# Altium PCB MY_PCB.PcbDoc
Units mm, origin at the board's own origin, x right, y up, seen from the top; angles counter-clockwise.
Board outline 45.25 x 50.04 mm, 2 copper layers (Top Layer, Bottom Layer); 70 components, 116 nets, 318 pads, 38 vias.
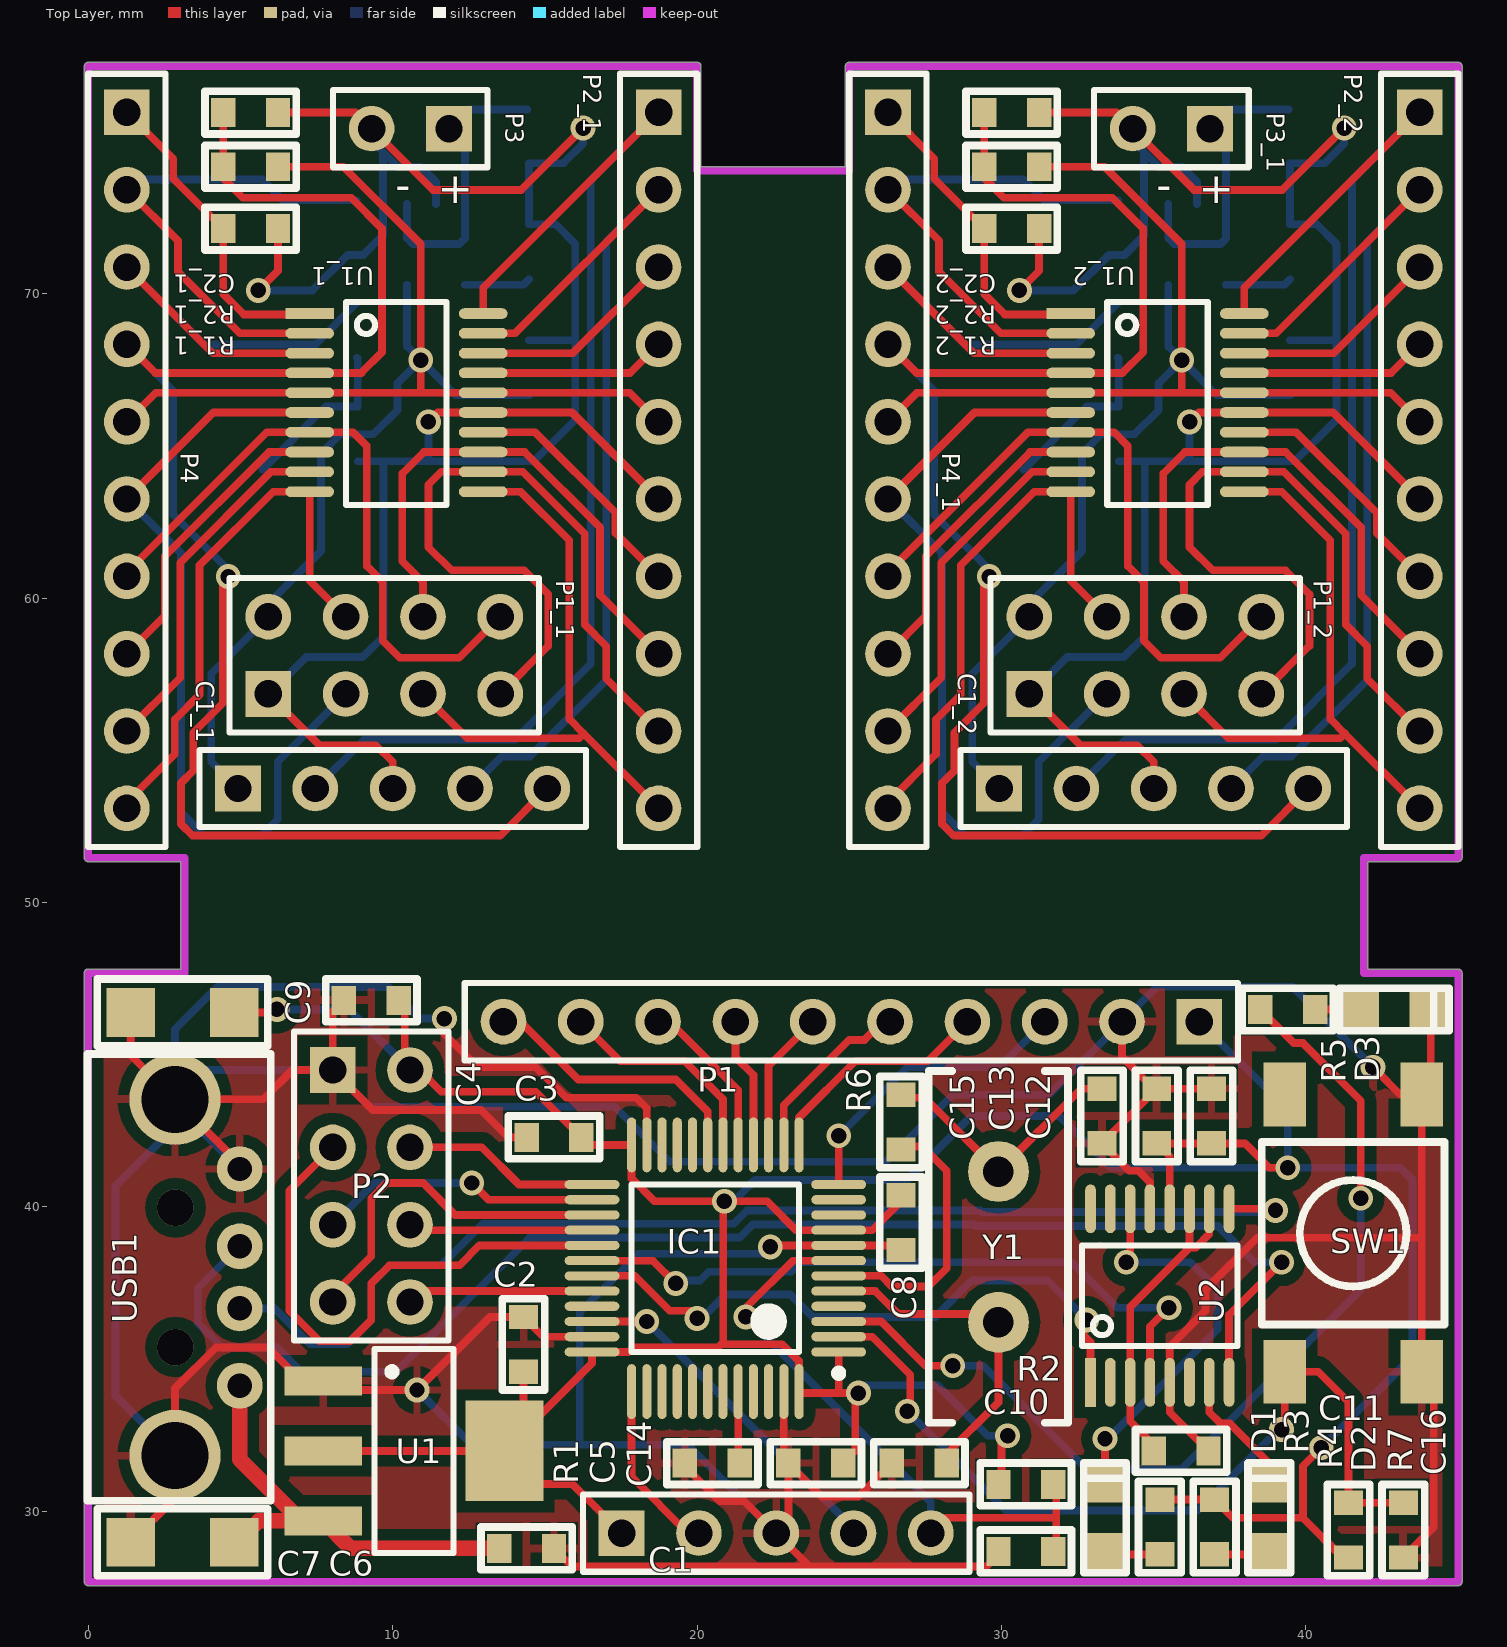
[diagram p0: Top Layer view]
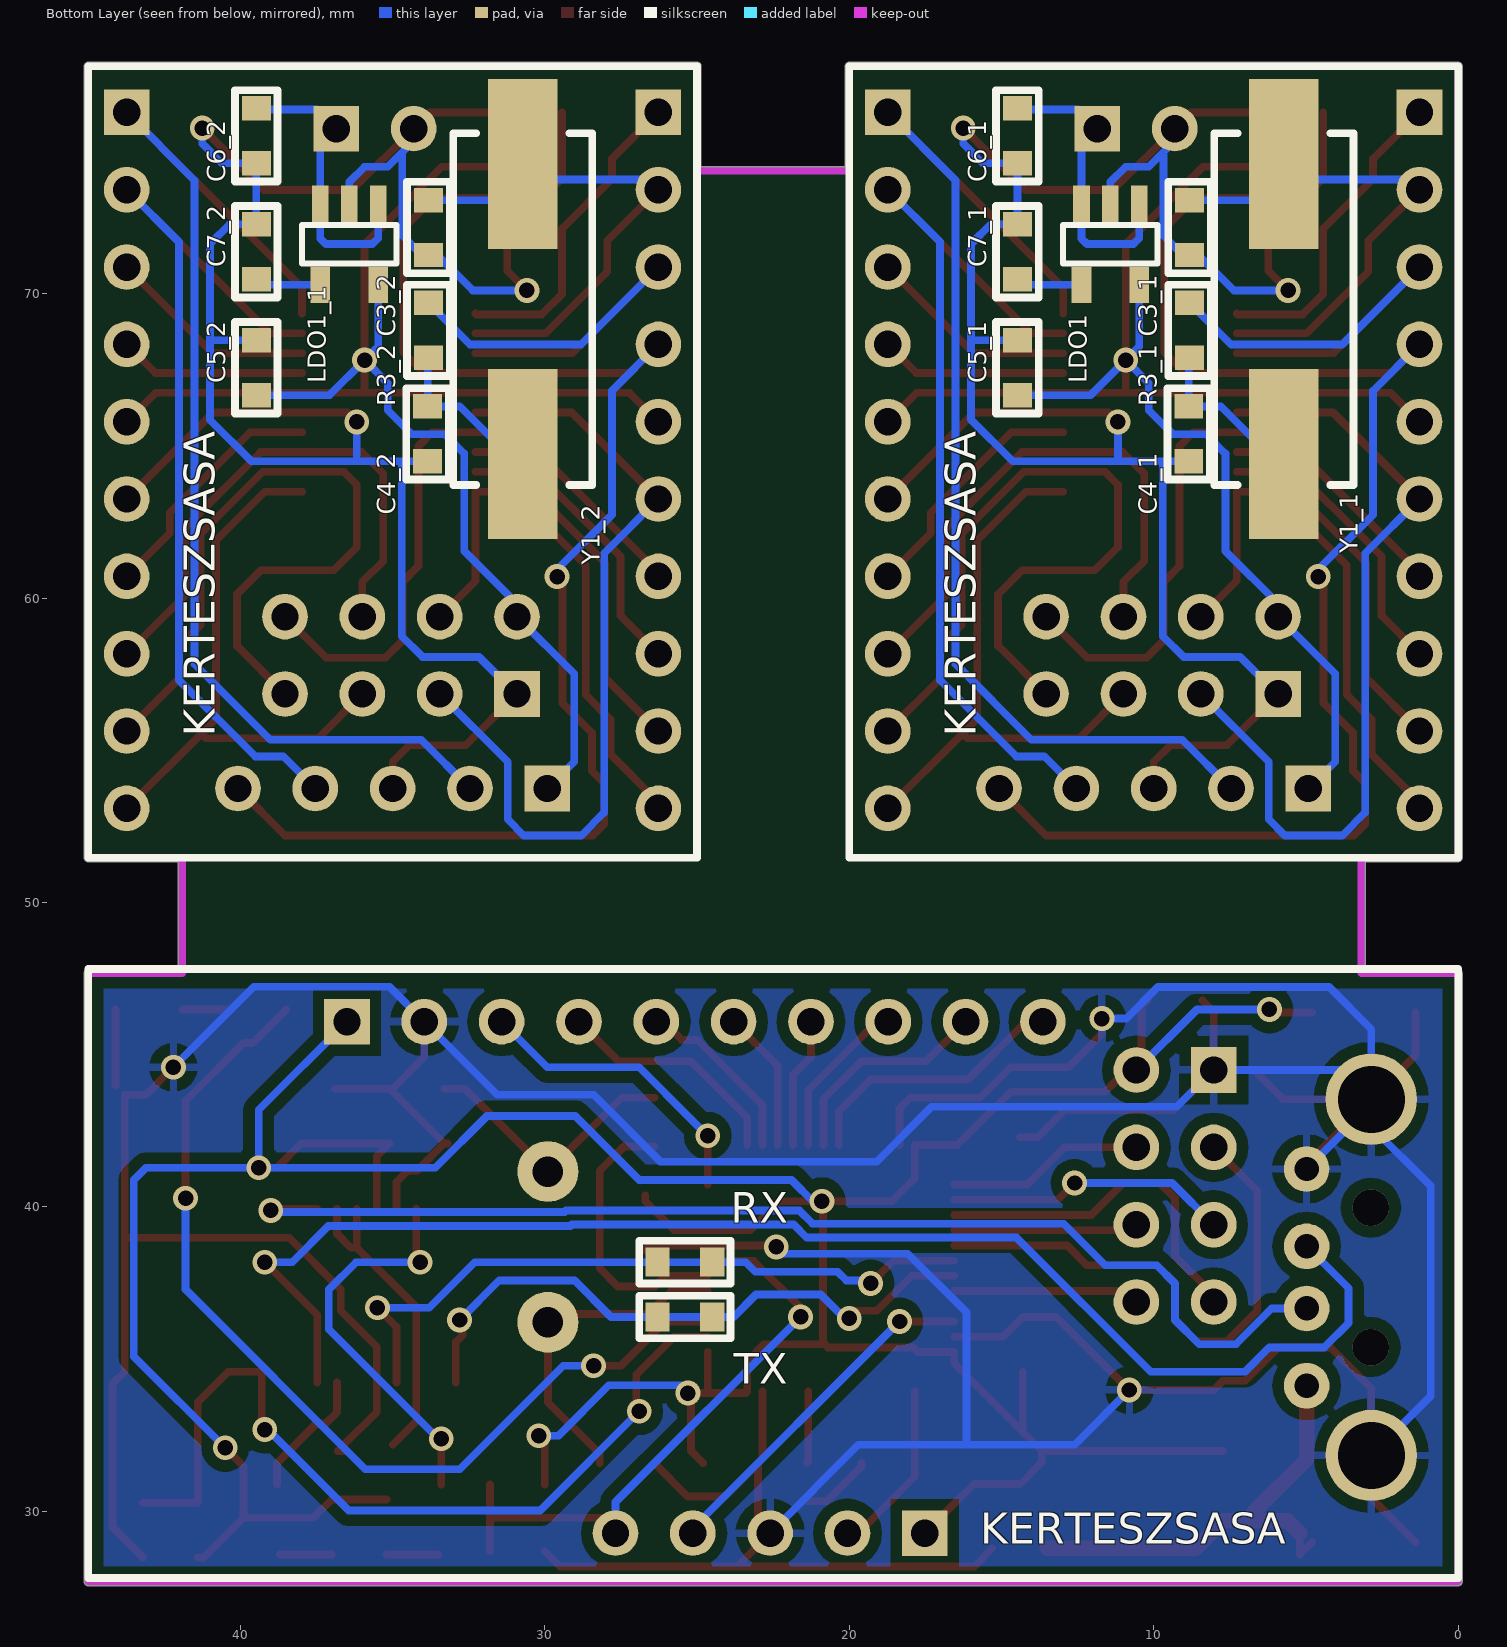
[diagram p1: Bottom Layer view, seen from below]

## Layer stack, top to bottom
Top Layer: signal copper 0.0356
Dielectric: dielectric 0.32, FR-4, Dk 4.8
Bottom Layer: signal copper 0.0356

## Board outline
-0.127,27.686 ccw(c0,27.686) 0,27.559 45,27.559 ccw(c45,27.686) 45.127,27.686 45.127,47.686 ccw(c45,47.686) 45,47.813 42.037,47.813 42.037,51.343 45,51.343 ccw(c45,51.47) 45.127,51.47 45.127,77.47 ccw(c45,77.47) 45,77.597 25,77.597 ccw(c25,77.47) 24.873,77.47 24.873,74.168 20.127,74.168 20.127,77.47 ccw(c20,77.47) 20,77.597 0,77.597 ccw(c0,77.47) -0.127,77.47 -0.127,51.47 ccw(c0,51.47) 0,51.343 3.048,51.343 3.048,47.813 0,47.813 ccw(c0,47.686) -0.127,47.686

## Design rules (kind name [scope] priority, off if disabled: settings)
Clearance [All] p1: gap=0.254
Height [All] p1: minheight=0 maxheight=50 prefheight=12.7
PolygonConnect [All] p1: connectstyle=Relief reliefconductorwidth=0.254 reliefentries=4 polygonreliefangle="90 Angle"
RoutingVias [All] p1: holewidth=0.711 width=1.27 viastyle="Through Hole" minholewidth=0.711 minwidth=1.27 maxholewidth=0.711 maxwidth=1.27
SilkscreenOverComponentPads [All] p1: minsilkscreentomaskgap=0.254
SolderMaskExpansion [All] p1: expansion=0.102
Width [All] p1: maxlimit=1.524 minlimit=0.254 preferedwidth=0.254
26 further rules are at their usual default settings.

## Classes and differential pairs
component class Servo_driver: C17 C19 C20 C21 C22 C23 C24 P5 R30 R31 R34 U3 Y2

## Components (designator, comment, footprint, x,y, rotation, side; value= is the part's Value field where it differs from the comment)
C1 "SWD" SWD 22.6,29.286 r90 top
C1_1 "SWD" SWD 10,53.745 r90 top (schematic designator C1)
C1_2 "SWD" SWD 35,53.745 r90 top (schematic designator C1)
C2 "100nF" FP_0603_CAP_080 14.3,35.486 r270 top
C2_1 "100nF" FP_0603_CAP_080 5.334,75.946 r0 top (schematic designator C2)
C2_2 "100nF" FP_0603_CAP_080 30.334,75.946 r0 top (schematic designator C2)
C3 "100nF" FP_0603_CAP_080 15.3,42.286 r0 top
C3_1 "22p" FP_0603_CAP_080 8.825,72.17 r90 bottom (schematic designator C3)
C3_2 "22p" FP_0603_CAP_080 33.825,72.17 r90 bottom (schematic designator C3)
C4 "100nF" FP_0603_CAP_080 9.3,46.786 r0 top
C4_1 "22p" FP_0603_CAP_080 8.85,65.395 r90 bottom (schematic designator C4)
C4_2 "22p" FP_0603_CAP_080 33.85,65.395 r90 bottom (schematic designator C4)
C5 "100nF" FP_0603_CAP_080 23.9,31.586 r0 top
C5_1 "10uF" FP_0603_CAP_080 14.478,67.564 r270 bottom (schematic designator C5)
C5_2 "10uF" FP_0603_CAP_080 39.478,67.564 r270 bottom (schematic designator C5)
C6 "100nF" FP_0603_CAP_080 14.4,28.786 r180 top
C6_1 "10uF" FP_0603_CAP_080 14.478,75.184 r90 bottom (schematic designator C6)
C6_2 "10uF" FP_0603_CAP_080 39.478,75.184 r90 bottom (schematic designator C6)
C7 "10uF" FP_1206_CAP_085 3.1,28.986 r180 top
C7_1 "10nF" FP_0603_CAP_080 14.478,71.374 r270 bottom (schematic designator C7)
C7_2 "10nF" FP_0603_CAP_080 39.478,71.374 r270 bottom (schematic designator C7)
C8 "100nF" FP_0603_CAP_080 26.7,39.486 r270 top
C9 "10uF" FP_1206_CAP_085 3.1,46.386 r0 top
C10 "100nF" FP_0603_CAP_080 30.8,28.686 r180 top
C11 "100nF" FP_0603_CAP_080 35.9,31.986 r0 top
C12 "1uF" FP_0603_CAP_080 36.9,42.986 r90 top
C13 "100nF" FP_0603_CAP_080 35.1,42.986 r90 top
C14 "22p" FP_0603_CAP_080 27.3,31.586 r0 top
C15 "22p" FP_0603_CAP_080 33.3,42.986 r90 top
C16 "100nF" FP_0603_CAP_080 43.2,29.386 r270 top
D1 "LED_RED" FP_0805_LED_RED 33.4,28.786 r90 top
D2 "LED_RED" FP_0805_LED_RED 38.8,28.786 r90 top
D3 "LED_RED" FP_0805_LED_RED 41.9,46.486 r0 top
IC1 "STM32F10x_TQFP48" LQFP48_N 20.6,37.986 r180 top
LDO1 "LP2985IM5-3.3" SUPPLY_SOT23-5 11.425,71.62 r270 bottom
LDO1_1 "LP2985IM5-3.3" SUPPLY_SOT23-5 36.425,71.62 r270 bottom (schematic designator LDO1)
P1 "Header 10" HDR1X10 36.5,46.086 r180 top
P1_1 "Header 4X2" FP_CONN8_SZK_ALLO 9.725,58.12 r0 top (schematic designator P1)
P1_2 "Header 4X2" FP_CONN8_SZK_ALLO 34.725,58.12 r0 top (schematic designator P1)
P2 "Header 4X2" FP_CONN8_SZK_ALLO 9.3,40.686 r270 top
P2_1 "Header 10" HDR1X10 18.736,75.952 r270 top (schematic designator P2)
P2_2 "Header 10" HDR1X10 43.736,75.952 r270 top (schematic designator P2)
P3 "Header 2" HDR1X2 11.85,75.42 r180 top
P3_1 "Header 2" HDR1X2 36.85,75.42 r180 top (schematic designator P3)
P4 "Header 10" HDR1X10 1.27,75.952 r270 top
P4_1 "Header 10" HDR1X10 26.27,75.952 r270 top (schematic designator P4)
R1 "10k" FP_0603_RES 20.5,31.586 r0 top
R1_1 "10k" FP_0603_RES 5.334,72.136 r180 top (schematic designator R1)
R1_2 "10k" FP_0603_RES 30.334,72.136 r180 top (schematic designator R1)
R2 "10k" FP_0603_RES 30.8,30.886 r0 top
R2_1 "10k" FP_0603_RES 5.334,74.168 r180 top (schematic designator R2)
R2_2 "10k" FP_0603_RES 30.334,74.168 r180 top (schematic designator R2)
R3 "330R" FP_0603_RES 35.2,29.486 r270 top
R3_1 "390R" FP_0603_RES 8.825,68.795 r270 bottom (schematic designator R3)
R3_2 "390R" FP_0603_RES 33.825,68.795 r270 bottom (schematic designator R3)
R4 "330R" FP_0603_RES 37,29.486 r270 top
R5 "330R" FP_0603_RES 39.4,46.486 r0 top
R6 "390R" FP_0603_RES 26.7,42.786 r90 top
R7 "10k" FP_0603_RES 41.4,29.386 r90 top
RX "0R" FP_0603_RES 25.4,38.186 r180 bottom
SW1 "SW1" FP_TACTBTN 43.8,43.686 r0 top
TX "0R" FP_0603_RES 25.4,36.386 r180 bottom
U1 "LD1117xx" SUPPLY_SOT223 10.7,31.986 r0 top
U1_1 "STM32F030F4P6" uC_TSSOP20 10.125,65.77 r0 top (schematic designator U1)
U1_2 "STM32F030F4P6" uC_TSSOP20 35.125,65.77 r0 top (schematic designator U1)
U2 "FT230XS" Digital_TSSOP16 35.2,37.086 r90 top
USB1 "USB connector" USB_A_th 5.08,37.686 r0 top
Y1 "8MHz Quartz HC49" FP_CRYSTAL_HC49_TH 29.9,38.686 r270 top
Y1_1 "8MHz Quartz HC49" FP_CRYSTAL_HC49_SMD 5.725,64.728 r90 bottom (schematic designator Y1)
Y1_2 "8MHz Quartz HC49" FP_CRYSTAL_HC49_SMD 30.725,64.728 r90 bottom (schematic designator Y1)

## Footprints (in the part's own frame and the unit in brackets; to place one, negate y for a bottom-side part, rotate by r counter-clockwise, add the part's x,y. Pads: shape width x height; smd on the part's side, far side on the other; paste and mask are expansions set on the pad)
Digital_TSSOP16 [mm] "TSSOP 16 l"
  rect 1.6x0.35 smd: 1(-2.85,2.275)
  oval 1.6x0.35 smd: 2(-2.85,1.625) 3(-2.85,0.975) 4(-2.85,0.325) 5(-2.85,-0.325) 6(-2.85,-0.975) 7(-2.85,-1.625) 8(-2.85,-2.275) 9(2.85,-2.275) 10(2.85,-1.625) 11(2.85,-0.975) 12(2.85,-0.325) 13(2.85,0.325) 14(2.85,0.975) 15(2.85,1.625) 16(2.85,2.275)
  silkscreen extent -1.65,-2.55 1.65,2.55, body extent -3.23,-2.56 3.23,2.54, height 1.35
FP_0603_CAP_080 [mm] "0.8mm magas 0603 kapacitás"
  rect 0.8x0.95 smd: 1(-0.9,0) 2(0.9,0)
  silkscreen extent -1.5,-0.7 1.5,0.7, body extent -0.8,-0.4 0.76,0.4, height 0.8
FP_0603_RES [mm] "0603 ellenállás"
  rect 0.8x0.95 smd: 1(-0.9,0) 2(0.9,0)
  silkscreen extent -1.5,-0.7 1.5,0.7, body extent -0.8,-0.4 0.8,0.4, height 0.44
FP_0805_LED_RED [mm] "0805 méretû piros LED"
  rect 1.2x1.3 smd: A(-0.1,0) K(2.1,0)
  silkscreen extent -0.8,-0.7 2.8,0.7, body extent 0.01,-0.63 2.03,0.62, height 1.1
FP_1206_CAP_085 [mm] "1206 kapacitás 0.85 mm"
  rect 1.6x1.6 smd: 1(-1.7,0) 2(1.7,0)
  silkscreen extent -2.8,-1.1 2.8,1.1, body extent -1.52,-0.79 1.58,0.79, height 0.85
FP_CONN8_SZK_ALLO [mm] "Connector; Header; 4x2 Position"
  rect 1.5x1.5 hole 0.9: 1(-3.81,-1.27)
  round 1.5 hole 0.9: 2(-3.81,1.27) 3(-1.27,-1.27) 4(-1.27,1.27) 5(1.27,-1.27) 6(1.27,1.27) 7(3.81,-1.27) 8(3.81,1.27)
  silkscreen extent -5.08,-2.54 5.08,2.54
FP_CRYSTAL_HC49_SMD [mil] "HC49/SMD"
  rect 220x90 smd: 1(0,0) 2(375,0)
  silkscreen extent -40,-90 415,90, body extent -57,-90 432,90, height 130
FP_CRYSTAL_HC49_TH [mm] "HC49/SMD"
  round 2 hole 1: 1(-2.476,0) 2(2.477,0)
  silkscreen extent -5.78,-2.29 5.78,2.29, body extent -5.49,-2.29 5.49,2.21, height 3.6
FP_TACTBTN [mm] "TE CONNECTIVITY / ALCOSWITCH - FSM2JSMA"
  rect 1.4x2.1 smd: 1(0,0) 2(0,-9.1) 3(-4.5,0) 4(-4.5,-9.1)
  silkscreen extent -5.25,-7.55 0.75,-1.55, body extent -5.23,-8.57 0.77,-0.42, height 5
HDR1X2 [mm] "Connector; Header; 2 Position"
  rect 1.5x1.5 hole 0.9: 1(0,0)
  round 1.5 hole 0.9: 2(2.54,0)
  silkscreen extent -1.27,-1.27 3.81,1.27
HDR1X10 [mm] "Connector; Header; 10 Position"
  rect 1.5x1.5 hole 0.9: 1(0,0)
  round 1.5 hole 0.9: 2(2.54,0) 3(5.08,0) 4(7.62,0) 5(10.16,0) 6(12.7,0) 7(15.24,0) 8(17.78,0) 9(20.32,0) 10(22.86,0)
  silkscreen extent -1.27,-1.27 24.13,1.27
LQFP48_N [mm] "Thin QFP, 48-Leads, Body 7x7mm, Pitch 0.5mm, IPC Medium Density"
  oval 1.8x0.3 smd: 1(-4.05,2.75) 2(-4.05,2.25) 3(-4.05,1.75) 4(-4.05,1.25) 5(-4.05,0.75) 6(-4.05,0.25) 7(-4.05,-0.25) 8(-4.05,-0.75) 9(-4.05,-1.25) 10(-4.05,-1.75) 11(-4.05,-2.25) 12(-4.05,-2.75) 25(4.05,-2.75) 26(4.05,-2.25) 27(4.05,-1.75) 28(4.05,-1.25) 29(4.05,-0.75) 30(4.05,-0.25) 31(4.05,0.25) 32(4.05,0.75) 33(4.05,1.25) 34(4.05,1.75) 35(4.05,2.25) 36(4.05,2.75)
  oval 0.3x1.8 smd: 13(-2.75,-4.05) 14(-2.25,-4.05) 15(-1.75,-4.05) 16(-1.25,-4.05) 17(-0.75,-4.05) 18(-0.25,-4.05) 19(0.25,-4.05) 20(0.75,-4.05) 21(1.25,-4.05) 22(1.75,-4.05) 23(2.25,-4.05) 24(2.75,-4.05) 37(2.75,4.05) 38(2.25,4.05) 39(1.75,4.05) 40(1.25,4.05) 41(0.75,4.05) 42(0.25,4.05) 43(-0.25,4.05) 44(-0.75,4.05) 45(-1.25,4.05) 46(-1.75,4.05) 47(-2.25,4.05) 48(-2.75,4.05)
  silkscreen extent -4.18,-2.75 2.75,3.57, body extent -3.5,-3.5 3.5,3.5, height 1.6
SUPPLY_SOT23-5 [mm] "SOT23, 5-Leads, Body 2.9x1.6mm, Pitch 0.95mm, Lead Span 2.8mm, IPC Medium Density"
  rect 1.2x0.55 smd mask+0.05: 1(-1.327,0.95) 2(-1.327,0) 3(-1.327,-0.95)
  rect 1.2x0.65 smd: 4(1.327,-0.95) 5(1.327,0.95)
  silkscreen extent -0.64,-1.55 0.64,1.55, body extent -1.17,-1.46 1.17,1.46, height 1
SUPPLY_SOT223 [mm] "SOT223 package, 3 leads"
  rect 2.55x0.95 smd: 1(-2.975,2.3) 2(-2.975,0) 3(-2.975,-2.3)
  rect 2.55x3.3 smd: 2(2.975,0)
  silkscreen extent -1.3,-3.35 1.3,3.35, body extent -3.5,-3.25 3.5,3.25, height 1.65
SWD [mm]
  rect 1.5x1.5 hole 0.9: 1(0,5.08)
  round 1.5 hole 0.9: 2(0,2.54) 3(0,0) 4(0,-2.54) 5(0,-5.08)
  silkscreen extent -1.27,-6.35 1.27,6.35
uC_TSSOP20 [mm]
  rect 1.6x0.35 smd: 1(-2.85,3.575)
  oval 1.6x0.35 smd: 2(-2.85,2.925) 3(-2.85,2.275) 4(-2.85,1.625) 5(-2.85,0.975) 6(-2.85,0.325) 7(-2.85,-0.325) 8(-2.85,-0.975) 9(-2.85,-1.625) 10(-2.85,-2.275) 11(2.85,-2.275) 12(2.85,-1.625) 13(2.85,-0.975) 14(2.85,-0.325) 15(2.85,0.325) 16(2.85,0.975) 17(2.85,1.625) 18(2.85,2.275) 19(2.85,2.925) 20(2.85,3.575)
  silkscreen extent -1.65,-2.72 1.65,3.95, body extent -3.1,-2.72 3.18,3.78, height 1.09
USB_A_th [mm]
  round 1.5 hole 0.8: 1(-0.102,-3.56) 2(-0.102,-1.02) 3(-0.102,1.02) 4(-0.102,3.56)
  round 3 hole 2.2: 5(-2.228,5.85) 6(-2.228,-5.85)
  round 0.1 on Top Overlay: 7(0,0.002)
  silkscreen extent -5.11,-7.34 0.91,7.34, body extent -19.92,-6.3 0,6.31, height 3.2

## Part data
C1 C1_1 C1_2: "ARM SWD connector"
C2 C2_1 C2_2 C3 C3_1 C3_2 C4 C4_1 C4_2 C5 C5_1 C5_2 C6 C6_1 C6_2 C7 C7_1 C7_2 C8 C9 C10 C11 C12 C13 C14 C15 C16: library part Cap, "Capacitor"
D1 D2 D3: library part LED_R, "Typical LED"
LDO1 LDO1_1: library part LP2985, "Micropower 150 mA Ultra Low-Dropout Regulator In SOT-23/6 and micro SMD Packages"
P1 P2_1 P2_2 P4 P4_1: "Header, 10-Pin"
P1_1 P1_2 P2: "Header, 4-Pin, Dual row"
P3 P3_1: "Header, 2-Pin"
R1 R1_1 R1_2 R2 R2_1 R2_2 R3 R3_1 R3_2 R4 R5 R6 R7 RX TX: library part Res3, "Resistor"
U1: "LD1117xx 3,3V lin reg"
U1_1 U1_2: "MCU 32-bit STM32F ARM Cortex M0 RISC 16KB Flash 2.5V/3.3V 20-Pin TSSOP"
U2: "USB-SERIAL"
USB1: library part USB_B_TH, "USB B conn TH"
Y1 Y1_1 Y1_2: library part "XTAL HC49", "Standard HC49 quartz"

## Via types
v1: diameter 0.813, hole 0.508, Top Layer to Bottom Layer, 36 vias
v2: diameter 1.2, hole 1.2, Top Layer to Bottom Layer, 2 vias

## Nets (pads, with @x,y where several pads share a name; then routed paths per layer and width w, separated by ;. In a path a pad name is that pad's centre, name@x,y a point inside that pad or via, vN(x,y) a via of type N, cw(c..) or ccw(c..) an arc to the next point about the centre after c; other vN are vias at no path point)
3V3: 
5V: 
A/D1: 
A/D2: 
A/D3: 
A/D4: 
AGND: 
BOOT0: 
DIGITAL_OUT_1: 
DIGITAL_OUT_2: 
DIGITAL_OUT_3: 
DIGITAL_OUT_4: 
DIGITAL_OUT_5: 
DIGITAL_OUT_6: 
GND: 
MISO: 
MOSI: 
NetC7_1: 
NetC7_2: 
NetC8_1: 
NetC15_2: 
NetC17_2: 
NetD1_A: 
NetD2_A: 
NetD3_K: 
NetD4_A: 
NetP1_1: 
NetP1_2: 
NetP1_3: 
NetP1_4: 
NetP1_5: 
NetP1_6: 
NetP1_7: 
NetP1_8: 
NetP1_9: 
NetP1_10: 
NetP1_11: 
NetP1_12: 
NetP1_13: 
NetP1_14: 
NetP1_15: 
NetP1_16: 
NetP1_17: 
NetP1_18: 
NetP3_1: 
NetP3_2: 
NetP3_3: 
NetP3_4: 
NetP3_5: 
NetP3_6: 
NetR2_1: 
NetR4_1: 
NetR5_1: 
NetR6_1: 
NetR7_1: 
NetR8_1: 
NetR9_1: 
NetR10_1: 
NetR12_1: 
NetR15_1: 
NetR16_1: 
NetR17_1: 
NetR18_1: 
NetR19_1: 
NetR20_1: 
NetR21_1: 
NetR22_1: 
NetR23_1: 
NetR24_1: 
NetR25_1: 
NetR26_1: 
NetR27_1: 
NetR28_1: 
NetR29_1: 
NetR30_1: 
NRST: 
NSS: 
NTRST: 
OSC32_IN: 
OSC32_OUT: 
OSC_IN: 
OSC_OUT: 
PROG_RX: 
PROG_TX: 
RX: 
SCK: 
SCL: 
SDA: 
SERVO_PWM1: 
SERVO_PWM2: 
SERVO_PWM3: 
SERVO_PWM4: 
SERVO_PWM5: 
SERVO_PWM6: 
SERVO_PWM7: 
SERVO_PWM8: 
SERVO_PWM9: 
SERVO_PWM10: 
SERVO_PWM11: 
SERVO_PWM12: 
SERVO_PWM13: 
SERVO_PWM14: 
SERVO_PWM15: 
SERVO_PWM16: 
SERVO_PWM17: 
SERVO_PWM18: 
TCK: 
TDI: 
TDO: 
TMS: 
TX: 
VCC: 
VDA: 
VDU_BAT: 
VIN: 
VREFH: 
pads on no net: C1.1 C1.2 C1.3 C1.4 C1.5 C1_1.1 C1_1.2 C1_1.3 C1_1.4 C1_1.5 C1_2.1 C1_2.2 C1_2.3 C1_2.4 C1_2.5 C2.1 C2.2 C2_1.1 C2_1.2 C2_2.1 C2_2.2 C3.1 C3.2 C3_1.1 C3_1.2 C3_2.1 C3_2.2 C4.1 C4.2 C4_1.1 C4_1.2 C4_2.1 C4_2.2 C5.1 C5.2 C5_1.1 C5_1.2 C5_2.1 C5_2.2 C6.1 C6.2 C6_1.1 C6_1.2 C6_2.1 C6_2.2 C7.1 C7.2 C7_1.1 C7_1.2 C7_2.1 C7_2.2 C8.1 C8.2 C9.1 C9.2 C10.1 C10.2 C11.1 C11.2 C12.1 C12.2 C13.1 C13.2 C14.1 C14.2 C15.1 C15.2 C16.1 C16.2 D1.A D1.K D2.A D2.K D3.A D3.K IC1.1 IC1.2 IC1.3 IC1.4 IC1.5 IC1.6 IC1.7 IC1.8 IC1.9 IC1.10 IC1.11 IC1.12 IC1.13 IC1.14 IC1.15 IC1.16 IC1.17 IC1.18 IC1.19 IC1.20 IC1.21 IC1.22 IC1.23 IC1.24 IC1.25 IC1.26 IC1.27 IC1.28 IC1.29 IC1.30 IC1.31 IC1.32 IC1.33 IC1.34 IC1.35 IC1.36 IC1.37 IC1.38 IC1.39 IC1.40 IC1.41 IC1.42 IC1.43 IC1.44 IC1.45 IC1.46 IC1.47 IC1.48 LDO1.1 LDO1.2 LDO1.3 LDO1.4 LDO1.5 LDO1_1.1 LDO1_1.2 LDO1_1.3 LDO1_1.4 LDO1_1.5 P1.1 P1.2 P1.3 P1.4 P1.5 P1.6 P1.7 P1.8 P1.9 P1.10 P1_1.1 P1_1.2 P1_1.3 P1_1.4 P1_1.5 P1_1.6 P1_1.7 P1_1.8 P1_2.1 P1_2.2 P1_2.3 P1_2.4 P1_2.5 P1_2.6 P1_2.7 P1_2.8 P2.1 P2.2 P2.3 P2.4 P2.5 P2.6 P2.7 P2.8 P2_1.1 P2_1.2 P2_1.3 P2_1.4 P2_1.5 P2_1.6 P2_1.7 P2_1.8 P2_1.9 P2_1.10 P2_2.1 P2_2.2 P2_2.3 P2_2.4 P2_2.5 P2_2.6 P2_2.7 P2_2.8 P2_2.9 P2_2.10 P3.1 P3.2 P3_1.1 P3_1.2 P4.1 P4.2 P4.3 P4.4 P4.5 P4.6 P4.7 P4.8 P4.9 P4.10 P4_1.1 P4_1.2 P4_1.3 P4_1.4 P4_1.5 P4_1.6 P4_1.7 P4_1.8 P4_1.9 P4_1.10 R1.1 R1.2 R1_1.1 R1_1.2 R1_2.1 R1_2.2 R2.1 R2.2 R2_1.1 R2_1.2 R2_2.1 R2_2.2 R3.1 R3.2 R3_1.1 R3_1.2 R3_2.1 R3_2.2 R4.1 R4.2 R5.1 R5.2 R6.1 R6.2 R7.1 R7.2 RX.1 RX.2 SW1.1 SW1.2 SW1.3 SW1.4 TX.1 TX.2 U1.1 U1.2 U1.3 U1_1.1 U1_1.2 U1_1.3 U1_1.4 U1_1.5 U1_1.6 U1_1.7 U1_1.8 U1_1.9 U1_1.10 U1_1.11 U1_1.12 U1_1.13 U1_1.14 U1_1.15 U1_1.16 U1_1.17 U1_1.18 U1_1.19 U1_1.20 U1_2.1 U1_2.2 U1_2.3 U1_2.4 U1_2.5 U1_2.6 U1_2.7 U1_2.8 U1_2.9 U1_2.10 U1_2.11 U1_2.12 U1_2.13 U1_2.14 U1_2.15 U1_2.16 U1_2.17 U1_2.18 U1_2.19 U1_2.20 U2.1 U2.2 U2.3 U2.4 U2.5 U2.6 U2.7 U2.8 U2.9 U2.10 U2.11 U2.12 U2.13 U2.14 U2.15 U2.16 USB1.1 USB1.2 USB1.3 USB1.4 USB1.5 USB1.6 USB1.7 Y1.1 Y1.2 Y1_1.1 Y1_1.2 Y1_2.1 Y1_2.2
copper on no net: | length 1740.4
  Top Layer w0.254: 1.27,53.092 1.27,53.298 2.845,54.873 2.845,56.007 3.658,56.82 3.658,61.078 6.075,63.495 7.275,63.495 7.275,60.57 8.455,59.39 ; 1.27,55.632 3.023,57.385 3.023,61.161 6.007,64.145 7.275,64.145 ; 1.27,58.172 2.515,59.417 2.515,61.371 5.938,64.795 7.275,64.795 ; 1.27,60.712 1.27,60.845 5.87,65.445 7.275,65.445 8.7,65.445 9.15,64.995 9.15,61.056 9.677,60.528 9.677,58.598 10.236,58.039 12.184,58.039 13.535,59.39 ; 1.27,63.252 4.113,66.095 7.275,66.095 ; 1.27,65.792 2.223,66.745 7.275,66.745 10.922,66.745 ; 1.27,68.332 2.207,67.395 7.275,67.395 8.975,67.395 9.652,68.072 9.652,72.136 8.636,73.152 5.08,73.152 4.434,73.798 4.434,75.946 ; 1.27,70.872 4.097,68.045 7.275,68.045 ; 1.27,73.412 2.95,71.732 2.95,70.72 4.975,68.695 7.275,68.695 ; 1.27,75.35 1.27,75.952 2.794,74.428 2.794,73.776 4.434,72.136 4.434,69.988 5.106,69.316 7.246,69.316 7.275,69.345 ; 1.4,28.986 2.852,30.438 2.852,31.836 2.852,34.038 4.2,35.386 5.9,35.386 7,34.286 7.725,34.286 8.025,33.986 v1(10.8,33.986) 13.2,36.386 14.3,36.386 14.95,35.736 16.55,35.736 ; 1.4,46.386 1.4,44.988 2.852,43.536 ; v1(4.597,60.706) 4.42,60.528 4.42,56.54 3.454,55.575 3.454,54.331 3.048,53.924 3.048,52.578 3.429,52.197 13.532,52.197 15.08,53.745 ; 4.8,28.986 5.2,28.586 5.2,29.286 ; 4.8,46.386 6.1,46.386 v1(6.2,46.486) ; 4.978,41.246 4.978,41.41 2.852,43.536 ; v1@5.841,70.103 5.841,70.357 6.234,70.75 6.234,72.136 ; 6.234,74.168 8.382,74.168 10.922,71.628 v1(10.922,67.818) 10.922,66.745 ; 6.234,75.946 8.784,75.946 9.31,75.42 11.324,73.406 14.224,73.406 v1(16.256,75.438) ; 6.294,56.85 5.915,56.85 7.596,55.169 9.449,55.169 10,54.618 10,53.745 9.399,53.745 ; 6.7,29.986 6.4,29.686 7.725,29.686 ; 7.725,31.986 13.675,31.986 ; 8.03,36.876 8.03,37.116 9.3,38.386 9.3,40.286 9.8,40.786 11,40.786 12.05,39.736 16.55,39.736 ; 8.03,41.956 6.6,40.526 6.6,36.586 7.6,35.586 8.6,35.586 9.3,36.286 9.3,37.486 9.9,38.086 12.2,38.086 12.85,38.736 16.55,38.736 ; 8.4,46.786 8.03,46.416 8.03,44.496 ; 10.2,46.786 10.4,46.586 10.4,44.666 10.57,44.496 10.89,44.496 11.6,43.786 14.7,43.786 16.2,42.286 16.45,42.036 17.85,42.036 17.85,40.936 18.6,40.186 v1@21.1,40.186 ; 10.57,36.876 10.79,36.876 11.15,37.236 16.55,37.236 ; 10.57,39.416 10.75,39.236 16.55,39.236 ; 10.57,41.956 12.93,41.956 14.15,40.736 16.55,40.736 ; 10.995,56.85 12.448,55.397 16.129,55.397 16.28,55.548 ; 10.995,59.39 10.995,60.531 10.312,61.214 10.312,64.089 11.018,64.795 12.975,64.795 14.337,64.795 16.815,62.317 16.815,60.093 18.736,58.172 ; v1(11.176,65.786) 11.485,66.095 12.975,66.095 15.893,66.095 18.736,63.252 ; v1(11.7,46.186) 11.7,45.686 12.8,44.586 14.7,44.586 15.7,43.586 18,43.586 18.35,43.236 18.35,42.036 ; v1(12.6,40.786) 13.15,40.236 16.55,40.236 ; 12.975,63.495 14.2,63.495 15.799,61.896 15.799,56.029 16.28,55.548 ; 12.975,65.445 14.675,65.445 17.323,62.797 17.323,62.125 18.736,60.712 ; 12.975,67.395 17.799,67.395 18.736,68.332 ; 12.975,68.045 15.909,68.045 18.736,70.872 ; 12.975,68.695 14.019,68.695 18.736,73.412 ; 12.975,69.345 12.975,70.191 18.736,75.952 ; 13.535,56.85 15.113,58.428 15.113,60.122 14.326,60.909 11.938,60.909 11.176,61.671 11.176,63.721 11.6,64.145 12.975,64.145 14.268,64.145 16.307,62.107 16.307,59.131 17.018,58.42 17.018,57.35 18.736,55.632 ; 13.64,46.086 14.2,46.086 16.1,44.186 19.3,44.186 20.35,43.136 20.35,42.036 ; 14.3,34.586 14.3,32.611 ; 14.4,42.286 13.8,42.286 12.9,43.186 9.34,43.186 8.03,44.496 ; 15.3,28.786 15.9,28.186 23.7,28.186 ; 16.18,46.086 17.48,44.786 19.6,44.786 20.85,43.536 20.85,42.036 ; 16.55,36.236 v1(18.35,36.236) ; 16.55,37.736 17.95,37.736 19.1,36.586 20,36.586 v1@20,36.436 ; 16.55,38.236 18.55,38.236 v1(19.3,37.486) ; 17.52,29.286 16.66,30.146 15.91,30.896 14.39,30.896 13.675,31.611 13.675,31.986 ; 17.85,33.936 17.85,31.136 19.7,29.286 20.06,29.286 ; 18.72,46.086 19.1,46.086 21.35,43.836 21.35,42.036 ; 18.736,53.092 16.28,55.548 ; 18.736,65.792 17.783,66.745 12.975,66.745 10.922,66.745 ; 19.6,31.586 19.6,31.486 20.75,30.336 21.55,30.336 22.6,29.286 ; 20.8,35.486 22.8,35.486 23.35,34.936 23.35,33.936 ; 21.26,46.086 21.26,44.926 21.85,44.336 21.85,42.036 ; 21.35,33.936 21.35,31.636 21.4,31.586 ; v1(21.6,36.386) 21.6,36.686 23.15,38.236 24.65,38.236 ; 22.35,42.036 22.35,44.636 23.8,46.086 ; v1(22.4,38.686) 22.45,38.736 24.65,38.736 26.55,38.736 26.7,38.586 ; 22.85,31.736 22.85,33.936 ; 22.85,42.036 22.85,43.336 25,45.486 25.5,45.486 26.1,46.086 26.34,46.086 ; 23.35,42.036 23.35,42.936 25.2,44.786 27.58,44.786 28.88,46.086 ; 23.4,33.886 v1(25.3,33.886) 25.2,33.786 25.2,31.986 24.8,31.586 ; 24.65,33.936 24.65,35.236 ; 24.65,35.736 25.75,35.736 27,34.486 27,33.386 v1(26.9,33.286) ; 24.65,36.236 26.05,36.236 27.5,34.786 v1(28.4,34.786) ; 24.65,37.236 25.85,37.236 26.6,36.486 29.623,36.486 29.9,36.209 29.9,33.586 28.2,31.886 28.2,31.586 ; 24.65,37.736 26.05,37.736 26.4,37.386 27.6,37.386 28.2,37.986 28.2,41.186 27.4,41.986 26.4,41.986 ; 24.65,40.736 v1(24.65,42.336) ; 26.27,53.092 26.27,53.298 27.845,54.873 27.845,56.007 28.658,56.82 28.658,61.078 31.075,63.495 32.275,63.495 32.275,60.57 33.455,59.39 ; 26.27,55.632 28.023,57.385 28.023,61.161 31.007,64.145 32.275,64.145 ; 26.27,58.172 27.515,59.417 27.515,61.371 30.938,64.795 32.275,64.795 ; 26.27,60.712 26.27,60.845 30.87,65.445 32.275,65.445 33.7,65.445 34.15,64.995 34.15,61.056 34.677,60.528 34.677,58.598 35.236,58.039 37.184,58.039 38.535,59.39 ; 26.27,63.252 29.113,66.095 32.275,66.095 ; 26.27,65.792 27.223,66.745 32.275,66.745 35.922,66.745 ; 26.27,68.332 27.207,67.395 32.275,67.395 33.975,67.395 34.652,68.072 34.652,72.136 33.636,73.152 30.08,73.152 29.434,73.798 29.434,75.946 ; 26.27,70.872 29.097,68.045 32.275,68.045 ; 26.27,73.412 27.95,71.732 27.95,70.72 29.975,68.695 32.275,68.695 ; 26.27,75.35 26.27,75.952 27.794,74.428 27.794,73.776 29.434,72.136 29.434,69.988 30.106,69.316 32.246,69.316 32.275,69.345 ; 26.4,31.586 25.3,30.486 24.1,30.486 23,31.586 23,29.686 22.6,29.286 ; 26.4,43.586 27.476,43.586 29.9,41.163 32.624,43.886 33.3,43.886 ; 26.7,40.386 26.7,40.186 25.75,39.236 24.65,39.236 23.25,39.236 22.3,40.186 v1@21.1,40.186 ; 27.68,29.286 28.18,29.786 31.8,29.786 ; v1(29.597,60.706) 29.42,60.528 29.42,56.54 28.454,55.575 28.454,54.331 28.048,53.924 28.048,52.578 28.429,52.197 38.532,52.197 40.08,53.745 ; 30,28.686 29.5,28.186 23.7,28.186 ; 30,30.886 30,32.286 v1(30.2,32.486) ; v1@30.841,70.103 30.841,70.357 31.234,70.75 31.234,72.136 ; 31.234,74.168 33.382,74.168 35.922,71.628 v1(35.922,67.818) 35.922,66.745 ; 31.234,75.946 33.784,75.946 34.31,75.42 36.324,73.406 39.224,73.406 v1(41.256,75.438) ; 31.294,56.85 30.915,56.85 32.596,55.169 34.449,55.169 35,54.618 35,53.745 34.399,53.745 ; 31.8,28.686 31.8,29.786 ; 31.8,30.886 31.8,29.786 ; v1(32.8,36.286) 32.7,36.186 32.7,35.786 32.925,35.561 32.925,34.236 ; 33.2,42.086 33.3,42.086 ; 33.4,30.886 v1@33.4,32.286 ; 33.5,28.586 35.2,28.586 ; 33.96,46.086 33.96,44.926 35.05,43.836 ; v1(34.1,38.186) 34.225,38.311 34.225,39.936 ; 34.875,34.236 34.875,36.061 v1(35.5,36.686) ; 34.875,39.936 34.875,40.811 34.5,41.186 34.2,41.186 33.3,42.086 ; 35,32.186 34.225,32.961 34.225,34.236 34.225,36.711 36.175,38.661 ; 35.2,30.386 37,30.386 37.6,29.786 39.9,29.786 ; 35.525,39.936 35.525,41.661 35.1,42.086 36.9,42.086 38,42.086 38.8,41.286 v1(39.4,41.286) ; 35.995,56.85 37.448,55.397 41.129,55.397 41.28,55.548 ; 35.995,59.39 35.995,60.531 35.312,61.214 35.312,64.089 36.018,64.795 37.975,64.795 39.337,64.795 41.815,62.317 41.815,60.093 43.736,58.172 ; 36.175,39.936 36.175,38.661 ; v1(36.176,65.786) 36.485,66.095 37.975,66.095 40.893,66.095 43.736,63.252 ; 36.6,31.986 36.8,31.986 ; 36.6,32.186 35.525,33.261 35.525,34.236 35.525,35.411 36.7,36.586 36.7,37.286 38.4,38.986 43.8,38.986 ; 36.825,34.236 36.825,33.261 37.2,32.886 37.5,32.886 38.8,31.586 38.8,30.886 ; 36.825,39.936 36.825,39.111 36.375,38.661 36.175,38.661 ; 36.9,43.886 35.1,43.886 35.05,43.836 ; 37,28.586 38.7,28.586 ; 37.475,34.236 37.475,36.461 v1(39.2,38.186) ; 37.475,39.936 38.95,39.936 v1(39,39.886) ; 37.975,63.495 39.2,63.495 40.799,61.896 40.799,56.029 41.28,55.548 ; 37.975,65.445 39.675,65.445 42.323,62.797 42.323,62.125 43.736,60.712 ; 37.975,67.395 42.799,67.395 43.736,68.332 ; 37.975,68.045 40.909,68.045 43.736,70.872 ; 37.975,68.695 39.019,68.695 43.736,73.412 ; 37.975,69.345 37.975,70.191 43.736,75.952 ; 38.5,46.486 39.6,45.386 39.9,45.386 41.8,43.486 v1(41.8,40.286) ; 38.535,56.85 40.113,58.428 40.113,60.122 39.326,60.909 36.938,60.909 36.176,61.671 36.176,63.721 36.6,64.145 37.975,64.145 39.268,64.145 41.307,62.107 41.307,59.131 42.018,58.42 42.018,57.35 43.736,55.632 ; v1@39.2,32.786 39.3,32.786 39.3,34.586 40.4,34.586 41.4,33.586 41.4,30.286 43.2,30.286 ; 40.3,46.486 41.9,46.486 ; v1(40.5,32.086) 39.9,31.486 39.9,29.786 ; 41.4,28.486 41.2,28.486 39.9,29.786 ; v1@42.3,44.486 43.1,43.686 43.8,43.686 43.8,38.986 ; 43.2,28.486 44.2,29.486 44.2,34.186 43.8,34.586 43.8,38.986 ; 43.736,53.092 41.28,55.548 ; 43.736,65.792 42.783,66.745 37.975,66.745 35.922,66.745 ; 44.1,43.986 44.1,46.486 ; 2.852,43.536 5.75,43.536 6.71,44.496 8.03,44.496 ; 13.675,31.986 14.3,32.611 ; 14.3,32.611 16.55,34.861 16.55,35.236 17.75,35.236 17.9,35.386 20.7,35.386 20.863,35.549 20.863,39.949 v1@21.1,40.186 ; 22.6,29.286 23.7,28.186 ; 33.3,42.086 35.05,43.836
  Top Layer w0.508: 4.978,34.126 4.978,31.708 6.7,29.986 ; 5.2,29.286 5.6,29.686 7.725,29.686 8.625,28.786 13.5,28.786
  Bottom Layer w0.254: 1.27,63.252 3.048,61.474 3.048,52.959 3.81,52.197 5.69,52.197 6.223,52.73 6.223,54.618 8.455,56.85 ; 1.27,68.332 2.794,66.808 2.794,62.738 v1@4.623,60.909 ; 1.27,70.872 3.816,68.326 7.456,68.326 8.825,69.695 ; 1.27,73.412 1.603,73.745 5.725,73.745 6.4,73.07 8.825,73.07 ; 2.852,31.836 0.9,33.788 0.9,40.686 2.852,42.638 2.852,43.536 2.852,45.838 4.237,47.223 9.863,47.223 10.9,46.186 v1(11.7,46.186) ; 4.92,53.745 4.039,54.626 4.039,57.514 5.915,59.39 5.915,59.814 7.645,61.544 7.645,64.745 8.28,65.38 9.366,65.38 10.16,66.173 10.16,67.056 v1(10.922,67.818) ; 4.978,36.666 6.12,36.666 7.3,35.486 8.5,35.486 9.3,36.286 9.3,37.486 9.9,38.086 11.596,38.086 12.959,39.449 21.205,39.449 21.636,39.88 29.302,39.88 29.349,39.832 38.946,39.832 v1(39,39.886) ; 4.978,38.706 3.6,37.328 3.6,36.186 4.4,35.386 6.2,35.386 7,34.586 10.1,34.586 14.506,38.992 21.394,38.992 21.825,39.423 29.112,39.423 29.16,39.375 37.111,39.375 38.3,38.186 v1(39.2,38.186) ; 4.978,41.246 3.812,42.412 3.812,44.496 8.03,44.496 9.24,43.286 17.3,43.286 19.1,41.486 26.2,41.486 28.4,43.686 31.56,43.686 33.96,46.086 35.103,47.229 39.557,47.229 v1@42.3,44.486 ; v1(5.588,70.104) 7.366,70.104 8.532,71.27 8.825,71.27 9.04,71.27 9.681,71.911 9.681,74.539 9.735,74.593 ; 5.725,64.22 7.8,66.295 8.85,66.295 8.85,67.87 8.825,67.895 ; 5.915,56.85 5.948,56.85 7.163,58.064 9.017,58.064 9.703,58.75 9.703,64.364 ; v1(6.2,46.486) 8.58,46.486 10.57,44.496 ; 7.46,53.745 9.062,55.347 14.021,55.347 16.51,57.836 16.51,73.726 18.736,75.952 ; 8.03,39.416 9.4,40.786 v1(12.6,40.786) ; 8.85,64.495 11.176,64.495 ; 9.31,75.42 9.31,75.018 9.735,74.593 ; 10.475,70.293 10.475,68.265 v1(10.922,67.818) ; 10.475,72.947 10.475,71.821 10.668,71.628 12.192,71.628 12.375,71.811 12.375,72.947 12.375,74.895 11.85,75.42 12.475,76.045 14.425,76.045 ; v1(10.8,33.986) 12.6,32.186 16.15,32.186 ; v1(11.176,65.786) 11.176,64.495 ; 11.425,72.947 11.425,73.665 10.922,74.168 10.16,74.168 9.735,74.593 ; 12.375,70.293 14.297,70.293 14.478,70.474 ; 12.54,53.745 13.593,54.798 14.513,54.798 17.018,57.302 17.018,71.694 18.736,73.412 ; 14.478,66.664 12.076,66.664 v1(10.922,67.818) ; 14.478,68.464 15.977,68.464 ; v1(16.256,75.438) 16.256,74.93 15.61,74.284 14.478,74.284 14.478,72.274 15.356,72.274 16.002,71.628 16.002,68.834 16.002,65.862 14.635,64.495 11.176,64.495 ; v1(18.35,36.236) 25.14,29.446 25.14,29.286 ; v1@19.3,37.586 20.1,37.586 20.386,37.872 23.086,37.872 23.4,38.186 32.3,38.186 33.8,36.686 v1(35.5,36.686) ; v1@20,36.436 20,36.186 20.937,37.123 23.063,37.123 23.8,36.386 24.5,36.386 26.3,36.386 27.827,36.386 29.027,37.586 31.5,37.586 v1(32.8,36.286) ; v1@21.1,40.186 21.15,40.136 21.9,40.886 26.9,40.886 29,42.986 31.9,42.986 33.6,41.286 v1(39.4,41.286) ; v1(21.6,36.386) 27.68,30.306 27.68,29.286 ; v1(22.4,38.686) 22.179,38.465 18.079,38.465 16.15,36.536 16.15,32.186 ; 22.6,29.286 19.7,32.186 16.15,32.186 ; v1(24.65,42.336) 25.2,42.886 26.9,44.586 29.92,44.586 31.42,46.086 ; v1(25.3,33.886) 25.557,34.143 27.896,34.143 29.553,32.486 v1(30.2,32.486) ; 26.27,63.252 28.048,61.474 28.048,52.959 28.81,52.197 30.69,52.197 31.223,52.73 31.223,54.618 33.455,56.85 ; 26.27,68.332 27.794,66.808 27.794,62.738 v1@29.623,60.909 ; 26.27,70.872 28.816,68.326 32.456,68.326 33.825,69.695 ; 26.27,73.412 26.603,73.745 30.725,73.745 31.4,73.07 33.825,73.07 ; v1(26.9,33.286) 30.157,30.029 36.443,30.029 v1@39.2,32.786 ; v1(28.4,34.786) 29.4,34.786 32.8,31.386 35.9,31.386 41.8,37.286 v1(41.8,40.286) ; 29.92,53.745 29.039,54.626 29.039,57.514 30.915,59.39 30.915,59.814 32.645,61.544 32.645,64.745 33.28,65.38 34.366,65.38 35.16,66.173 35.16,67.056 v1(35.922,67.818) ; v1(30.588,70.104) 32.366,70.104 33.532,71.27 33.825,71.27 34.04,71.27 34.681,71.911 34.681,74.539 34.735,74.593 ; 30.725,64.22 32.8,66.295 33.85,66.295 33.85,67.87 33.825,67.895 ; 30.915,56.85 30.948,56.85 32.163,58.064 34.017,58.064 34.703,58.75 34.703,64.364 ; 32.46,53.745 34.062,55.347 39.021,55.347 41.51,57.836 41.51,73.726 43.736,75.952 ; v1@33.4,32.286 37.1,35.986 37.1,37.286 36.2,38.186 v1(34.1,38.186) ; 33.85,64.495 36.176,64.495 ; 34.31,75.42 34.31,75.018 34.735,74.593 ; 35.475,70.293 35.475,68.265 v1(35.922,67.818) ; 35.475,72.947 35.475,71.821 35.668,71.628 37.192,71.628 37.375,71.811 37.375,72.947 37.375,74.895 36.85,75.42 37.475,76.045 39.425,76.045 ; v1(36.176,65.786) 36.176,64.495 ; 36.425,72.947 36.425,73.665 35.922,74.168 35.16,74.168 34.735,74.593 ; 36.5,46.086 39.4,43.186 v1(39.4,41.286) ; 37.375,70.293 39.297,70.293 39.478,70.474 ; 37.54,53.745 38.593,54.798 39.513,54.798 42.018,57.302 42.018,71.694 43.736,73.412 ; 39.478,66.664 37.076,66.664 v1(35.922,67.818) ; 39.478,68.464 40.977,68.464 ; v1(40.5,32.086) 43.5,35.086 43.5,40.886 43.1,41.286 v1(39.4,41.286) ; v1(41.256,75.438) 41.256,74.93 40.61,74.284 39.478,74.284 39.478,72.274 40.356,72.274 41.002,71.628 41.002,68.834 41.002,65.862 39.635,64.495 36.176,64.495
  other v1: 33.4,32.386 39.2,32.686 20,36.336 20.9,40.186 42.2,44.586
  other v2: 2.867,35.396 2.867,39.976

## Polygon pours and split planes (outlines as drawn)
no net on Bottom Layer "BOTTOM GND" (solid, remove dead copper, pour order 4): 0,27.686 45,27.686 45,47.686 0,47.686
no net on Top Layer "TOP GND" (solid, remove dead copper, pour order 5): 0,27.686 45,27.686 45,47.686 0,47.686

## Keep-outs
Keep-Out Layer:
  lines w0.254: 3.175,51.435 3.175,47.686 0,47.686 0,27.686 45,27.686 45,47.686 41.91,47.686 41.91,51.47 45,51.47 45,77.47 25,77.47 25,74.041 20,74.041 20,77.47 0,77.47 0,51.47 3.175,51.47

## Silkscreen, mask and mechanical layers (free items; w line width, h text height)
Top Overlay:
  text "+  -" at 12.649,73.838 h1.02 r180
  text "+  -" at 37.649,73.838 h1.02 r180
Bottom Overlay:
  lines w0.254: 0,27.813 0,47.813 45,47.813 45,27.813 0,27.813 ; 0,51.47 20,51.47 20,77.47 0,77.47 0,51.47 ; 25,51.47 45,51.47 45,77.47 25,77.47 25,51.47
  text "KERTESZSASA" at 15.85,55.448 h1.02 r270
  text "KERTESZSASA" at 40.85,55.448 h1.02 r270
  text "KERTESZSASA" at 15.7,28.93 h1.02